# Altium PCB PCB2.PcbDoc
Units mm, origin at the board's own origin, x right, y up, seen from the top; angles counter-clockwise.
Board outline 366.78 x 253.36 mm, 2 copper layers (Top Layer, Bottom Layer); 22 components, 0 nets, 128 pads, 42 vias.
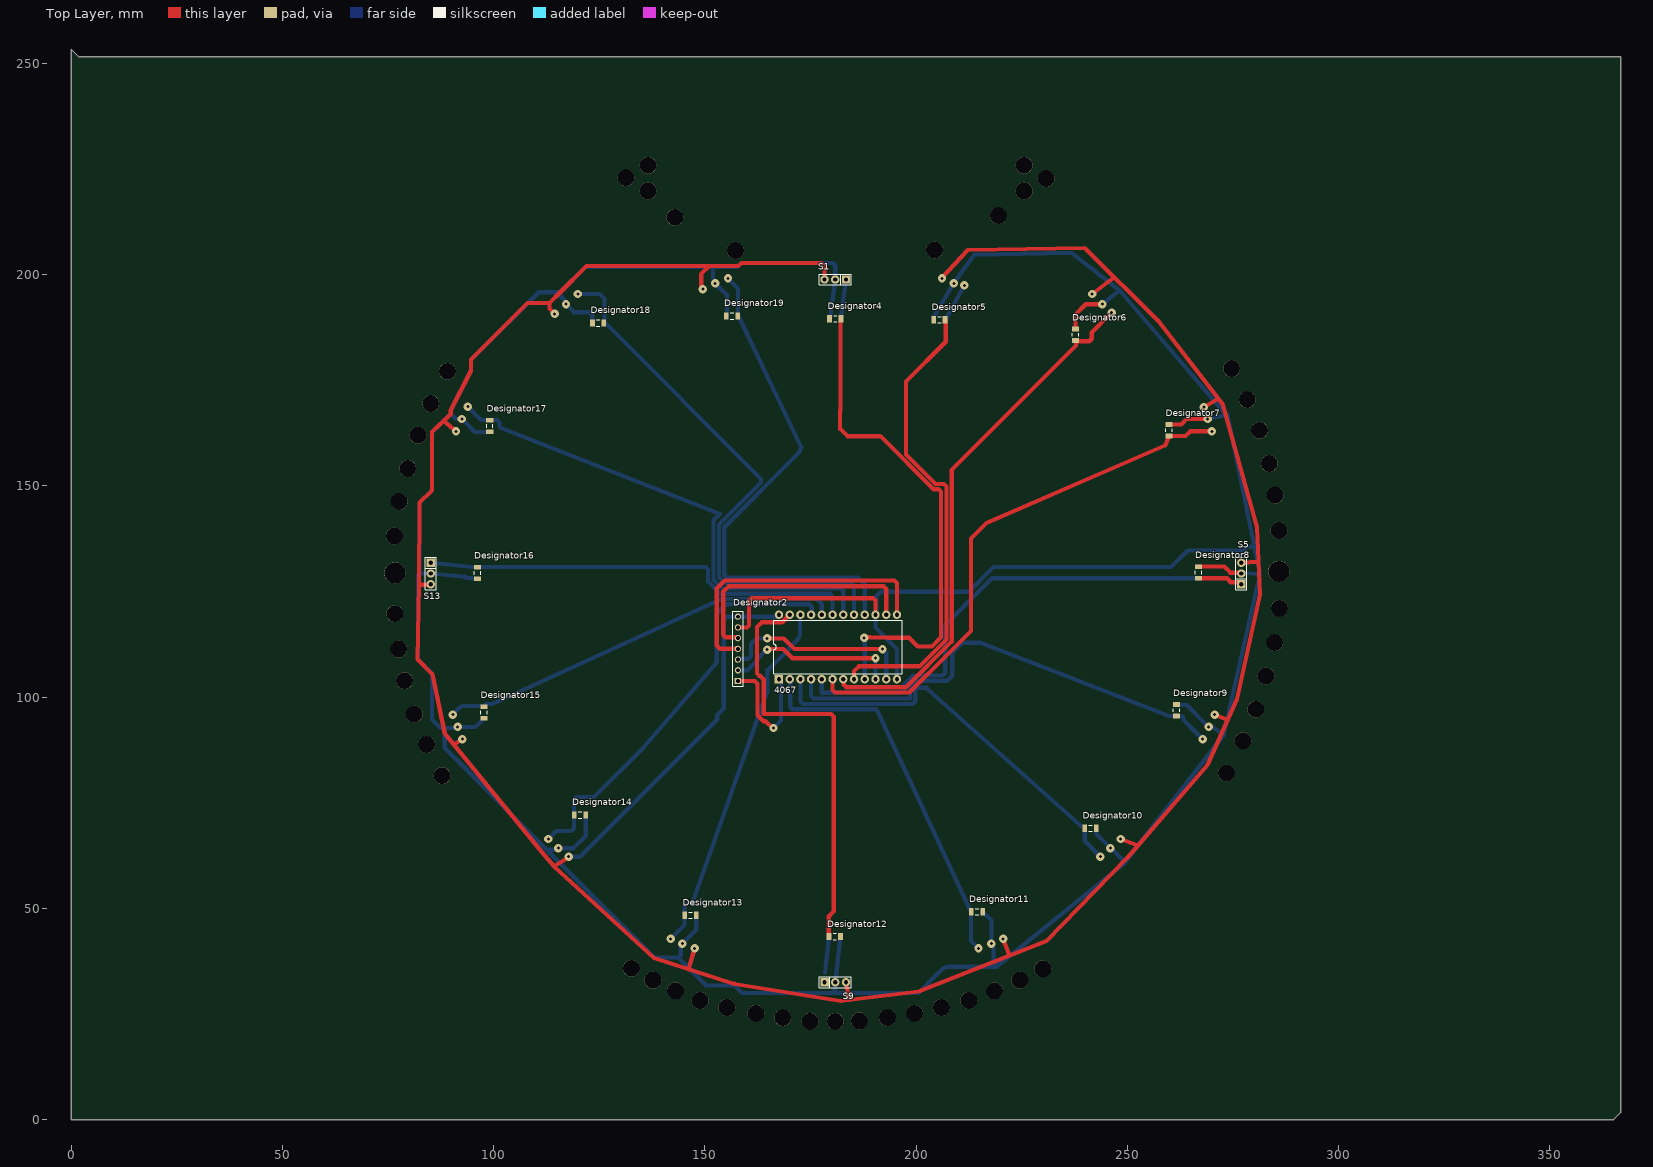
[diagram p0: Top Layer view]
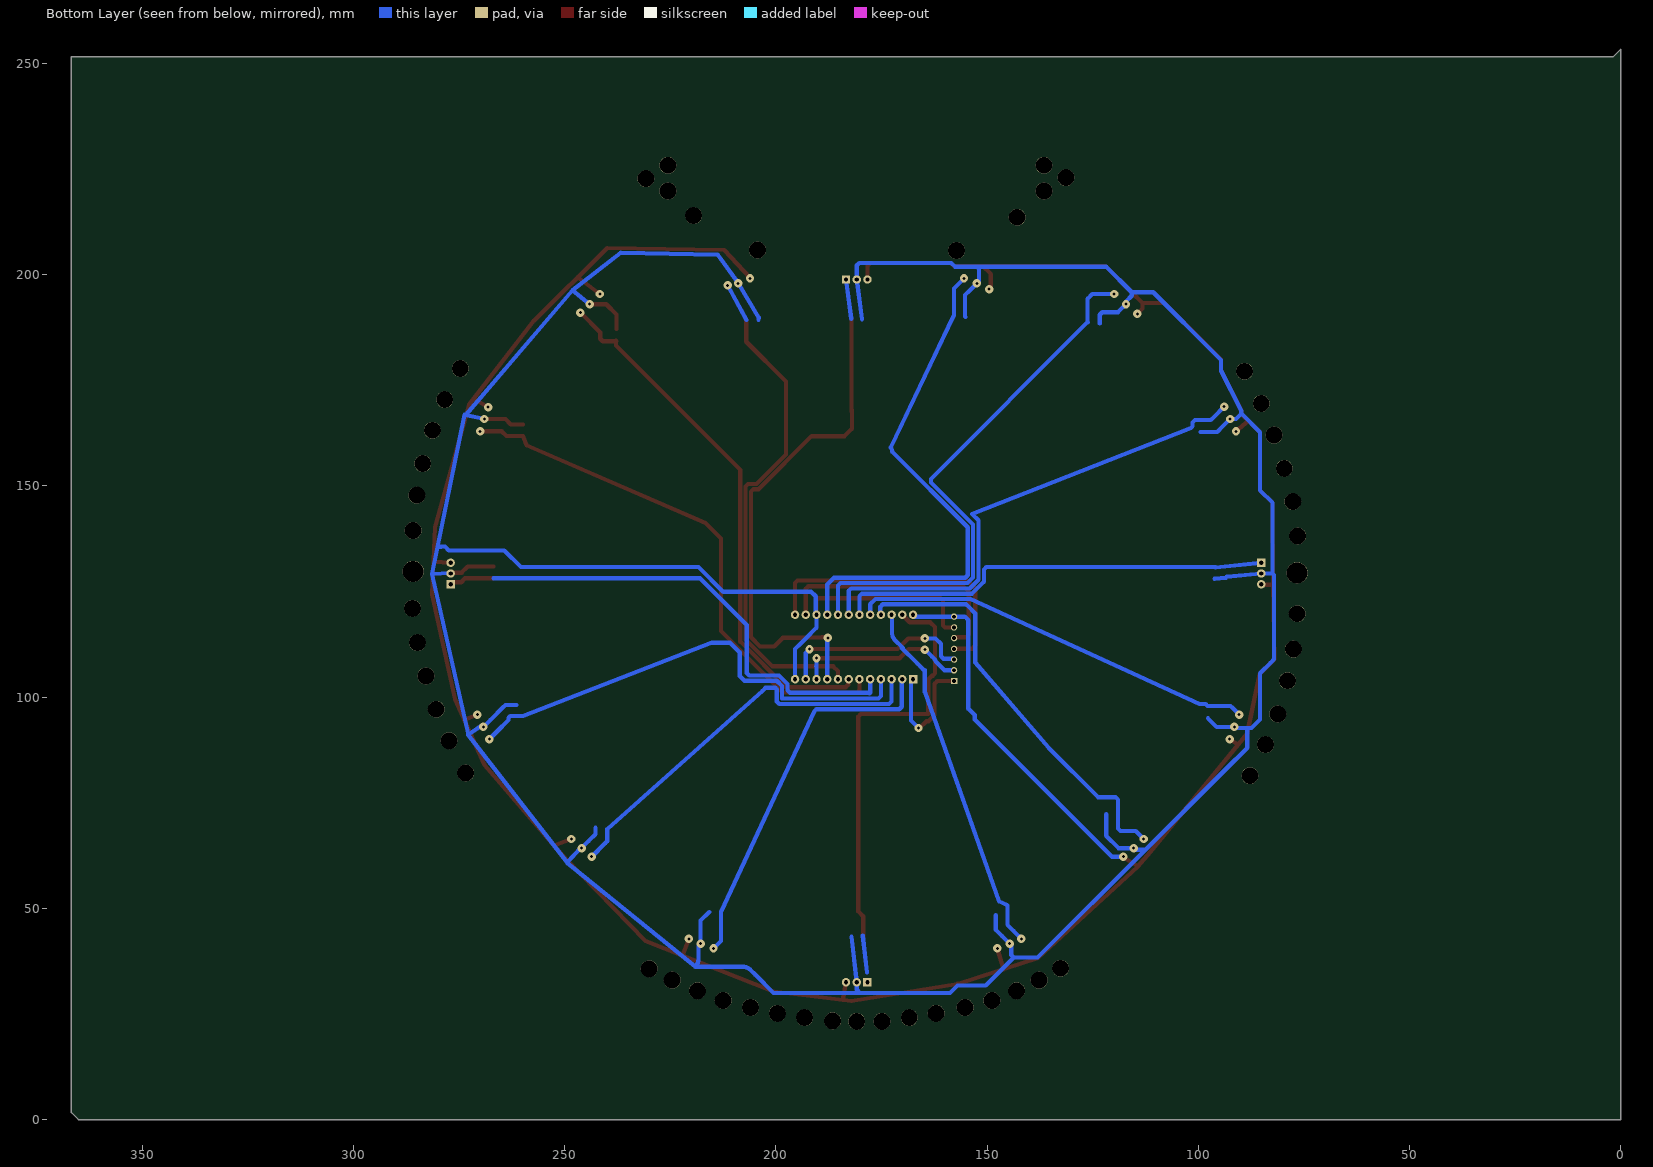
[diagram p1: Bottom Layer view, seen from below]

## Layer stack, top to bottom
Top Solder: solder mask 0.0102, Solder Resist, Dk 3.5
Top Layer: signal copper 0.0356
Dielectric 1: dielectric 0.32, FR-4, Dk 4.8
Bottom Layer: signal copper 0.0356
Bottom Solder: solder mask 0.0102, Solder Resist, Dk 3.5

## Board outline
0,0 365.125,0 366.776,1.651 366.776,251.587 1.778,251.587 0,253.365

## Design rules (kind name [scope] priority, off if disabled: settings)
Clearance [All] p1: gap=0.254 ignorepadtopadclearanceinfootprint=FALSE except(0: Arc-Hole Track-Hole SMDPad-Hole THPad-Hole Via-Hole Fill-Hole Poly-Hole Region-Hole Text-Hole)
PolygonConnect [All] p1: connectstyle=Relief reliefconductorwidth=0.254 reliefentries=4 polygonreliefangle="90 Angle" airgapwidth=0.254
RoutingVias [All] p1: holewidth=0.711 width=1.27 viastyle="Through Hole" minholewidth=0.711 minwidth=1.27 maxholewidth=0.711 maxwidth=1.27
SolderMaskExpansion [All] p1: expansion=0.102
Width Width_1 [(InNet('gnd') OR InNet('vcc') OR InNet('vss'))] p1: maxlimit=2 minlimit=0.1 preferedwidth=1.6 minimp=50.000000 maximp=50.000000 favimp=50.000000
Width [All] p2: maxlimit=2 minlimit=0.1 preferedwidth=1 minimp=50.000000 maximp=50.000000 favimp=50.000000
30 further rules are at their usual default settings.

## Components (designator, comment, footprint, x,y, rotation, side; value= is the part's Value field where it differs from the comment)
Designator2 "Comment" HDR1X7 157.797,103.822 r90 top
Designator4 "Comment" MY_CAP_SMD_1206 180.848,189.611 r180 top
Designator5 "Comment" MY_CAP_SMD_1206 205.486,189.357 r180 top
Designator6 "Comment" MY_CAP_SMD_1206 237.744,185.801 r90 top
Designator7 "Comment" MY_CAP_SMD_1206 259.842,163.195 r90 top
Designator8 "Comment" MY_CAP_SMD_1206 266.827,129.54 r90 top
Designator9 "Comment" MY_CAP_SMD_1206 261.62,96.901 r90 top
Designator10 "Comment" MY_CAP_SMD_1206 241.3,68.961 r0 top
Designator11 "Comment" MY_CAP_SMD_1206 214.376,49.215 r0 top
Designator12 "Comment" MY_CAP_SMD_1206 180.721,43.307 r0 top
Designator13 "Comment" MY_CAP_SMD_1206 146.558,48.387 r0 top
Designator14 "Comment" MY_CAP_SMD_1206 120.396,72.136 r0 top
Designator15 "Comment" MY_CAP_SMD_1206 97.663,96.393 r270 top
Designator16 "Comment" MY_CAP_SMD_1206 96.139,129.413 r270 top
Designator17 "Comment" MY_CAP_SMD_1206 99.06,164.211 r270 top
Designator18 "Comment" MY_CAP_SMD_1206 124.714,188.595 r180 top
Designator19 "Comment" MY_CAP_SMD_1206 156.4,190.246 r180 top
S1 "" SIP3#1 183.388,198.882 r180 top
S5 "" SIP3#2 276.987,126.746 r90 top
S9 "" SIP3#2 178.308,32.512 r0 top
S13 "" SIP3#3 85.09,131.826 r270 top
? "4067" DIP24 167.513,104.267 r90 top

## Footprints (in the part's own frame and the unit in brackets; to place one, negate y for a bottom-side part, rotate by r counter-clockwise, add the part's x,y. Pads: shape width x height; smd on the part's side, far side on the other; paste and mask are expansions set on the pad)
DIP24 [mm]
  round 2 hole 1: 95(15.24,-5.08) 96(15.24,-2.54) 97(0,-2.54) 98(0,-5.08) 99(0,-7.62) 100(0,-10.16) 101(0,-12.7) 102(0,-15.24) 103(0,-17.78) 104(15.24,-20.32) 105(15.24,-17.78) 106(15.24,-15.24) 107(15.24,-12.7) 108(15.24,-10.16) 109(15.24,-7.62) 110(0,-20.32) a(0,-22.86) b(0,-25.4) c(15.24,-25.4) d(15.24,-27.94) gnd(0,-27.94) gnd(15.24,-22.86) vcc(15.24,0)
  rect 2x2 hole 1: adc0(0,0)
  silkscreen extent 1.27,-29.21 13.97,1.27
HDR1X7 [mm] "Connector; Header; 7 Position"
  round 1.5 hole 0.9: a(2.54,0) b(5.08,0) c(10.16,0) d(7.62,0) gnd(12.7,0) vcc(15.24,0)
  rect 1.5x1.5 hole 0.9: adc0(0,0)
  silkscreen extent -1.27,-1.27 16.51,1.27
MY_CAP_SMD_1206 [mm]
  rect 1.1x1.7 smd: 1(-1.35,0) 2(1.35,0)
  silkscreen extent -0.4,-0.75 0.4,0.75, body extent -1.52,-0.76 1.68,0.84, height 1.2
SIP3#1 [mm]
  rect 2x2 hole 1: 1(0,0)
  round 2 hole 1: gnd(2.54,0) vcc(5.08,0)
  silkscreen extent -1.27,-1.27 6.35,1.27
SIP3#2 [mm]
  rect 2x2 hole 1: 1(0,0)
  round 2 hole 1: 2(2.54,0) 3(5.08,0)
  silkscreen extent -1.27,-1.27 6.35,1.27
SIP3#3 [mm]
  rect 2x2 hole 1: 1(0,0)
  round 2 hole 1: 3(5.08,0) gnd(2.54,0)
  silkscreen extent -1.27,-1.27 6.35,1.27

## Free pads (board coordinates)
  round 4 hole 4: 11(77.597,146.304) 11(284.861,112.903) 13(218.567,30.48) 14(193.167,24.13) 15(168.402,24.13) 16(143.002,30.48) 21(131.318,223.012) 21(230.759,222.758) 22(77.47,111.379) 22(284.988,147.828) 23(87.757,81.407) 23(274.701,177.8) 83(79.629,154.178) 83(282.829,105.029) 85(136.525,225.933) 85(225.552,219.837) 88(85.09,169.545) 88(89.027,177.165) 88(273.431,82.042) 88(277.368,89.662) 89(136.525,219.837) 89(142.875,213.614) 89(157.226,205.74) 89(204.343,205.867) 89(219.456,213.995) 89(225.552,225.933) 91(180.848,23.241) 92(205.994,26.543) 93(132.588,35.814) 93(229.997,35.687) 94(155.194,26.543) 98(81.153,96.012) 98(281.305,163.195) 102(174.879,23.241) 103(186.563,23.368) 104(199.644,25.146) 105(212.471,28.194) 106(162.052,25.146) 107(148.844,28.194) 108(137.668,33.02) 109(224.536,33.02) 110(76.454,138.176) 110(286.004,121.031) 119(76.581,119.761) 119(285.877,139.446) 120(78.867,103.886) 120(283.591,155.321) 121(84.074,88.773) 121(278.384,170.434) 133(82.042,162.052) 133(280.416,97.155)
  round 5 hole 5: 82(76.581,129.413) 82(285.877,129.794)

## Via types
v1: diameter 2, hole 0.711, Top Layer to Bottom Layer, 42 vias

## Nets (pads, with @x,y where several pads share a name; then routed paths per layer and width w, separated by ;. In a path a pad name is that pad's centre, name@x,y a point inside that pad or via, vN(x,y) a via of type N, cw(c..) or ccw(c..) an arc to the next point about the centre after c; other vN are vias at no path point)
pads on no net: ?.95 ?.96 ?.97 ?.98 ?.99 ?.100 ?.101 ?.102 ?.103 ?.104 ?.105 ?.106 ?.107 ?.108 ?.109 ?.110 ?.a ?.adc0 ?.b ?.c ?.d ?.gnd ?.vcc Designator2.a Designator2.adc0 Designator2.b Designator2.c Designator2.d Designator2.gnd Designator2.vcc Designator4.1 Designator4.2 Designator5.1 Designator5.2 Designator6.1 Designator6.2 Designator7.1 Designator7.2 Designator8.1 Designator8.2 Designator9.1 Designator9.2 Designator10.1 Designator10.2 Designator11.1 Designator11.2 Designator12.1 Designator12.2 Designator13.1 Designator13.2 Designator14.1 Designator14.2 Designator15.1 Designator15.2 Designator16.1 Designator16.2 Designator17.1 Designator17.2 Designator18.1 Designator18.2 Designator19.1 Designator19.2 S1.1 S1.gnd S1.vcc S5.1 S5.2 S5.3 S9.1 S9.2 S9.3 S13.1 S13.3 S13.gnd
copper on no net: | length 3744.3
  Top Layer w1: 85.09,126.619 82.296,126.619 ; 88.138,165.448 v1(91.059,162.941) ; 90.576,88.773 v1(92.583,90.043) ; v1(114.427,190.754) 113.19,191.991 113.19,193.327 ; v1@117.803,62.111 114.3,59.944 ; 146.106,35.608 v1(147.574,40.513) ; v1@149.098,196.596 149.098,200.152 151.003,202.057 ; 157.797,114.173 154.891,114.173 154.305,114.759 154.305,124.968 155.575,126.238 192.327,126.238 192.913,125.652 192.913,119.507 ; 157.988,104.013 158.179,103.822 161.768,103.822 162.433,103.157 162.433,95.713 163.831,94.316 164.343,94.316 165.948,92.71 v1(166.219,92.71) ; 157.988,111.633 157.797,111.442 153.558,111.442 152.781,112.219 152.781,125.73 154.559,127.508 154.686,127.635 194.867,127.635 195.453,127.049 195.453,122.007 195.453,119.507 ; 157.988,116.713 158.179,116.522 159.928,116.522 160.401,116.995 160.401,122.858 160.987,123.444 189.787,123.444 190.373,122.858 190.373,122.007 190.373,119.507 ; v1@164.719,111.379 168.529,111.379 170.688,109.22 187.873,109.22 v1(190.373,109.22) ; v1(164.719,113.919) 168.656,113.919 171.196,111.379 189.524,111.379 v1(192.024,111.379) ; 170.053,119.507 168.285,117.739 163.459,117.739 162.306,116.586 162.306,111.335 162.306,108.286 162.306,105.66 162.814,105.067 163.03,105.067 163.908,104.189 163.908,96.012 179.881,96.012 180.467,95.426 180.467,49.276 179.324,48.133 179.324,43.307 ; 178.308,198.882 178.308,201.382 178.308,202.057 177.546,202.819 158.623,202.819 157.861,202.057 151.003,202.057 ; 180.213,104.267 180.213,101.678 180.799,101.092 198.374,101.092 207.391,110.109 212.979,115.697 212.979,124.333 212.979,137.541 216.662,141.224 258.979,159.65 259.842,161.845 263.779,161.845 264.875,162.941 267.502,162.941 v1(270.002,162.941) ; 181.991,168.021 181.991,163.576 183.769,161.798 191.521,161.798 204.078,149.241 205.313,149.241 205.899,148.655 205.899,114.18 203.733,112.014 200.383,112.014 198.351,114.046 196.156,114.046 193.29,114.046 189.063,114.173 187.813,114.173 v1@187.833,114.046 ; 182.118,167.64 182.118,186.984 182.118,189.611 ; 182.753,104.267 182.88,104.14 182.88,102.932 183.466,102.346 197.612,102.346 208.407,113.141 208.407,153.797 237.871,183.261 237.871,184.451 ; 183.388,32.512 184.164,28.321 ; 185.293,104.267 185.293,106.172 186.426,107.305 200.797,107.305 207.153,113.66 207.153,149.909 206.567,150.495 204.597,150.495 197.612,157.48 197.612,174.752 207.01,184.15 207.01,189.357 ; v1@206.038,199.213 212.217,205.867 239.903,206.375 257.302,189.103 272.669,169.164 280.67,140.208 281.432,124.333 275.971,99.568 268.986,83.947 249.936,61.976 230.886,42.291 200.533,30.353 182.118,28.067 156.972,32.131 137.922,38.227 114.3,59.944 ; v1(220.599,42.799) 222.123,38.844 ; 237.744,184.277 240.968,184.277 241.554,184.863 241.554,186.356 v1(246.253,191.055) ; 237.744,187.151 237.744,190.627 240.157,193.04 241.594,193.04 v1(244.094,193.04) ; v1(241.681,195.453) 246.888,199.441 ; v1(248.412,66.421) 252.469,64.897 ; 259.842,164.545 262.716,164.545 262.763,164.592 264.033,165.862 266.486,165.862 v1(268.986,165.862) ; 266.827,128.143 273.558,128.143 274.487,127.214 276.519,127.214 276.987,126.746 ; 266.827,130.937 272.923,130.937 273.177,130.683 274.383,129.477 276.796,129.477 276.987,129.286 276.716,129.286 ; v1(268.097,168.656) 271.526,170.647 ; v1(270.637,95.885) 273.756,94.615 ; 276.987,131.826 281.06,132.08 ; 82.296,126.619 81.915,108.966 85.471,105.41 88.392,91.44 111.379,63.373 114.3,59.944 ; 82.296,126.619 82.423,146.05 85.344,148.971 85.344,162.814 89.789,167.005 89.789,167.894 94.615,177.292 94.615,179.959 107.983,193.327 113.19,193.327 ; 113.19,193.327 115.73,195.867 121.92,202.057 151.003,202.057
  Bottom Layer w1: 85.09,131.826 95.903,130.732 ; 88.392,92.71 88.392,88.011 93.472,82.931 112.522,63.881 ; v1@90.488,95.694 v1(90.297,95.885) 92.065,97.653 92.329,97.917 92.837,97.917 97.79,97.917 98.231,98.358 99.667,98.358 153.924,123.254 176.426,123.254 177.673,122.007 177.673,119.507 ; v1@91.44,92.71 87.376,92.71 85.344,94.742 85.344,105.664 82.804,108.204 82.042,108.966 82.042,111.125 82.042,128.905 82.423,129.286 ; v1(91.44,92.964) 93.94,92.964 95.631,92.964 97.663,94.996 ; v1(93.853,168.783) 96.393,166.243 97.028,165.608 99.314,165.608 100.76,165.608 101.346,165.022 101.346,164.162 101.749,163.759 153.543,143.383 152.051,141.891 152.051,127.817 154.106,125.762 182.167,125.762 182.753,125.176 182.753,119.507 ; 95.903,130.81 150.163,130.81 150.749,130.224 150.749,127.346 153.587,124.508 179.627,124.508 180.213,123.922 180.213,119.507 ; 96.139,128.016 93.456,128.268 93.247,128.52 85.09,129.286 82.423,129.286 ; 99.441,162.814 95.504,162.814 94.224,164.094 v1(92.456,165.862) 91.083,165.862 89.789,167.156 ; v1(112.903,66.421) 114.671,68.189 114.808,68.326 118.413,68.326 118.999,68.912 118.999,72.263 118.999,75.741 119.585,76.327 123.743,76.327 135.455,88.039 152.781,108.204 152.781,119.819 154.657,121.695 154.962,122 174.674,122 175.26,121.414 175.26,119.634 175.133,119.507 ; v1@115.316,63.881 112.522,63.881 ; v1(115.316,64.262) 117.816,64.262 118.872,64.262 121.793,67.183 121.793,72.263 ; v1(117.729,62.23) 120.396,62.23 151.765,93.599 152.908,94.742 152.908,95.758 154.432,97.282 154.432,118.237 155.257,119.062 157.797,119.062 167.322,119.062 167.513,119.253 ; v1(119.888,195.453) 122.388,195.453 125.095,195.453 126.238,194.31 126.238,188.785 ; 123.317,188.468 123.317,190.549 122.731,191.135 118.999,191.135 118.862,191.272 v1(117.094,193.04) 117.094,193.675 115.73,195.039 115.73,195.867 ; 126.174,188.785 163.289,151.671 163.289,150.843 153.305,140.859 153.305,128.336 154.625,127.016 184.707,127.016 185.293,126.43 185.293,119.507 ; v1(141.859,42.799) 143.627,44.567 145.161,46.101 145.161,48.26 145.161,50.673 145.288,50.8 147.142,51.683 164.719,101.232 164.719,106.426 ; 147.955,48.387 147.955,44.958 146.421,43.424 v1(144.653,41.656) 144.272,41.275 144.272,38.94 143.686,38.354 ; 155.067,189.992 155.194,190.119 155.194,194.437 155.194,195.199 154.168,196.225 v1(152.4,197.993) 151.892,198.501 151.892,201.344 152.478,201.93 ; v1(155.448,199.136) 157.797,196.787 157.797,194.945 157.797,190.286 ; 157.797,109.093 160.323,109.093 160.909,109.679 160.909,112.649 162.179,113.919 162.219,113.919 v1(164.719,113.919) ; 157.945,190.286 172.784,159.097 172.435,158.115 ; 157.988,106.553 158.179,106.362 160.083,106.362 162.219,108.498 162.219,108.752 162.951,109.484 v1(164.719,111.252) ; 164.973,106.426 165.896,107.349 166.6,108.053 170.248,111.701 169.912,111.641 171.983,113.713 172.377,114.449 172.506,115.102 172.506,119.42 172.593,119.507 ; v1(166.219,92.71) 167.973,94.464 167.973,103.807 167.513,104.267 ; 170.18,104.267 170.18,97.741 170.766,97.155 190.412,97.155 190.83,96.737 212.984,49.152 ; 172.466,158.146 154.559,140.239 154.559,128.856 155.145,128.27 186.231,128.27 187.247,127.254 187.833,126.668 187.833,119.507 ; 172.593,104.267 172.593,98.995 173.179,98.409 199.185,98.409 199.771,98.995 199.771,101.854 200.152,102.235 202.438,102.235 203.073,101.6 239.901,68.816 239.901,65.915 240.411,65.405 v1(243.586,62.23) ; 175.133,104.267 175.133,100.249 175.719,99.663 198.517,99.663 198.517,102.632 199.771,103.886 207.391,103.886 208.534,105.029 208.534,110.617 210.82,112.903 215.138,112.903 259.822,95.525 261.747,95.525 262.853,95.525 263.271,95.107 263.271,94.615 266.075,91.811 v1(267.843,90.043) ; 177.673,104.267 177.673,101.767 177.673,101.044 ; 177.8,100.917 177.673,101.044 ; 178.435,34.798 179.422,43.579 ; 179.578,189.484 180.848,198.882 180.848,202.233 180.262,202.819 159.258,202.819 158.496,202.819 157.607,201.93 152.478,201.93 ; 182.118,43.307 180.848,32.512 180.848,30.734 180.086,29.972 ; 182.136,189.619 183.388,198.882 183.515,198.755 ; 187.833,104.267 v1@187.833,114.046 ; 190.373,104.267 190.373,106.767 v1(190.373,109.22) ; 190.373,107.276 190.412,107.315 ; v1(192.024,111.379) 192.913,110.49 192.913,106.767 192.913,104.267 ; 195.453,104.267 195.453,111.379 194.183,112.649 192.913,113.919 190.373,116.459 190.373,119.507 190.564,119.698 190.564,123.889 191.643,124.968 212.471,124.968 218.313,130.81 260.35,130.81 264.287,134.747 277.42,134.747 278.338,135.665 279.166,135.665 279.194,135.636 280.102,135.636 ; 204.136,189.357 204.011,189.862 v1(208.915,197.993) ; 206.942,189.288 v1(211.408,197.485) ; v1@208.844,198.045 213.741,204.724 236.728,205.232 248.158,196.342 ; 212.979,49.152 212.979,43.815 212.979,42.291 v1(214.757,40.513) ; 215.773,49.152 217.805,47.12 217.805,44.156 v1(217.805,41.656) 218.313,41.148 218.313,38.009 ccw(c220.853,38.009) 219.057,36.213 ; 242.697,69.088 242.697,67.564 244.231,66.03 v1(245.999,64.262) ; v1@244.092,193.042 248.158,196.342 ; v1@246.101,64.359 249.428,60.833 ; 261.366,98.171 264.033,98.171 264.541,97.663 267.472,94.732 v1(269.24,92.964) ; 266.827,128.143 217.932,128.143 206.885,117.096 206.885,105.739 206.3,105.154 199.265,105.154 197.263,103.151 197.263,101.63 196.677,101.044 177.673,101.044 ; v1@268.985,165.865 273.685,166.878 ; v1@269.113,93.218 269.113,93.091 v1(269.24,92.964) ; 276.991,129.37 281.432,129.159 ; 82.423,129.286 82.423,146.05 85.344,148.971 85.344,153.797 85.344,162.711 89.789,167.156 ; 89.789,167.156 89.789,167.767 94.615,177.292 94.615,179.832 95.885,181.102 110.65,195.867 115.73,195.867 ; 112.522,63.881 138.049,38.354 143.686,38.354 ; 115.73,195.867 121.793,201.93 152.478,201.93 ; 143.686,38.354 150.29,31.75 156.972,31.75 158.75,29.972 180.086,29.972 ; 180.086,29.972 200.533,29.972 204.851,34.29 206.012,35.451 cw(c207.808,33.655) 207.808,36.195 219.075,36.195 219.057,36.213 ; 219.057,36.213 249.428,60.833 ; 248.158,196.342 273.431,166.823 273.685,166.878 ; 249.428,60.833 272.796,91.059 ; v1(269.24,92.964) 269.925,93.083 272.796,91.059 ; 272.796,91.059 281.432,129.159 ; 273.685,166.878 281.432,129.159
  other v1: 187.706,114.046 149.479,196.596 206.121,199.136

## Silkscreen, mask and mechanical layers (free items; w line width, h text height)
Top Solder:
  circle w0.254: c180.848,129.286 r110
  lines w0.254: 67.818,129.286 180.848,129.286 302.641,129.286 ; 85.993,67.138 122.703,33.192 129.698,40.337 ; 86.06,67.206 93.055,74.352 129.765,40.405 ; 86.506,140.452 146.558,136.271 89.415,155.073 ccw(c146.558,136.271) 86.546,140.449 ; 89.347,103.477 cw(c146.558,122.174) 86.506,118.12 146.558,122.174 89.415,103.499 ; 93.125,183.434 128.871,218.394 121.96,225.622 ; 93.153,183.405 86.242,190.632 121.987,225.593 ; 97.961,82.867 151.638,109.855 110.169,73.568 ; 97.961,175.705 151.892,148.971 110.169,185.004 ccw(c113.462,168.021) 97.962,175.704 ; 98.171,82.973 ccw(c114.173,91.018) 110.168,73.561 ; 134.403,46.347 cw(c141.989,61.722) 125.13,58.607 161.036,100.33 134.429,46.399 ; 141.006,221.677 ccw(c180.856,261.527) 220.705,221.677 ; 141.011,221.742 141.011,231.742 ; 144.198,194.753 cw(c141.224,221.361) 125.13,199.965 161.417,158.369 144.201,194.723 ; 155.848,129.286 cw(c180.848,129.286) 205.848,129.286 ; 169.675,34.855 cw(c174.371,94.869) 155.061,37.853 174.371,94.869 169.682,34.944 ; 172.559,198.752 cw(c168.021,206.756) 160.49,201.47 174.244,163.703 172.62,198.801 ; 201.196,201.477 cw(c193.675,206.756) 189.076,198.801 187.706,163.576 201.206,201.47 ; 206.626,37.879 cw(c187.579,94.869) 192.014,34.944 187.579,94.869 206.635,37.853 ; 220.767,221.742 220.767,231.742 ; 231.994,218.141 268.704,184.195 275.7,191.34 ; 232.061,218.209 239.057,225.355 275.767,191.408 ; 236.566,58.607 200.66,100.457 227.267,46.399 ccw(c219.663,61.849) 236.575,58.606 ; 236.566,199.965 200.152,158.496 217.495,194.723 ccw(c220.472,221.234) 236.569,199.961 ; 239.582,32.952 275.327,67.912 268.416,75.14 ; 239.609,32.923 232.698,40.15 268.444,75.111 ; 251.527,185.004 210.058,148.59 263.735,175.705 ccw(c247.904,167.708) 251.54,185.068 ; 263.735,82.867 210.312,110.363 251.527,73.568 ccw(c248.065,90.932) 263.809,82.829 ; 272.281,155.073 215.138,136.144 275.19,140.452 ccw(c215.905,136.398) 272.314,155.084 ; 275.19,118.12 215.265,122.809 272.281,103.499 ccw(c215.265,122.809) 275.279,118.113 ; 315.465,227.666 352.175,193.72 359.17,200.865 ; 315.532,227.734 322.527,234.88 359.237,200.933 ; 326.517,7.62 362.263,42.58 355.352,49.808 ; 326.545,7.591 319.633,14.819 355.379,49.779 ; 333.82,210.693 340.816,217.839 ; 337.506,32.299 344.418,25.071

## Dimensions
322.453,161.036 to 322.707,5.207 on Top Solder
180.848,243.586 to 182.753,9.779 on Top Solder
354.344,195.936 to 356.831,198.476 on Top Solder
352.175,193.72 to 354.661,196.26 on Top Solder
322.527,234.88 to 320.041,232.34 on Top Solder
320.358,232.664 to 317.871,230.124 on Top Solder